# Altium PCB steve.PcbDoc (part 1 of 3)
Units mm, origin at the board's own origin, x right, y up, seen from the top; angles counter-clockwise.
Board outline 168.82 x 167.1 mm, 4 copper layers (Top Layer, Mid-Layer 1, Mid-Layer 2, Bottom Layer); 272 components, 254 nets, 1057 pads, 241 vias.
Unrouted connection lines stored in the file: 229.
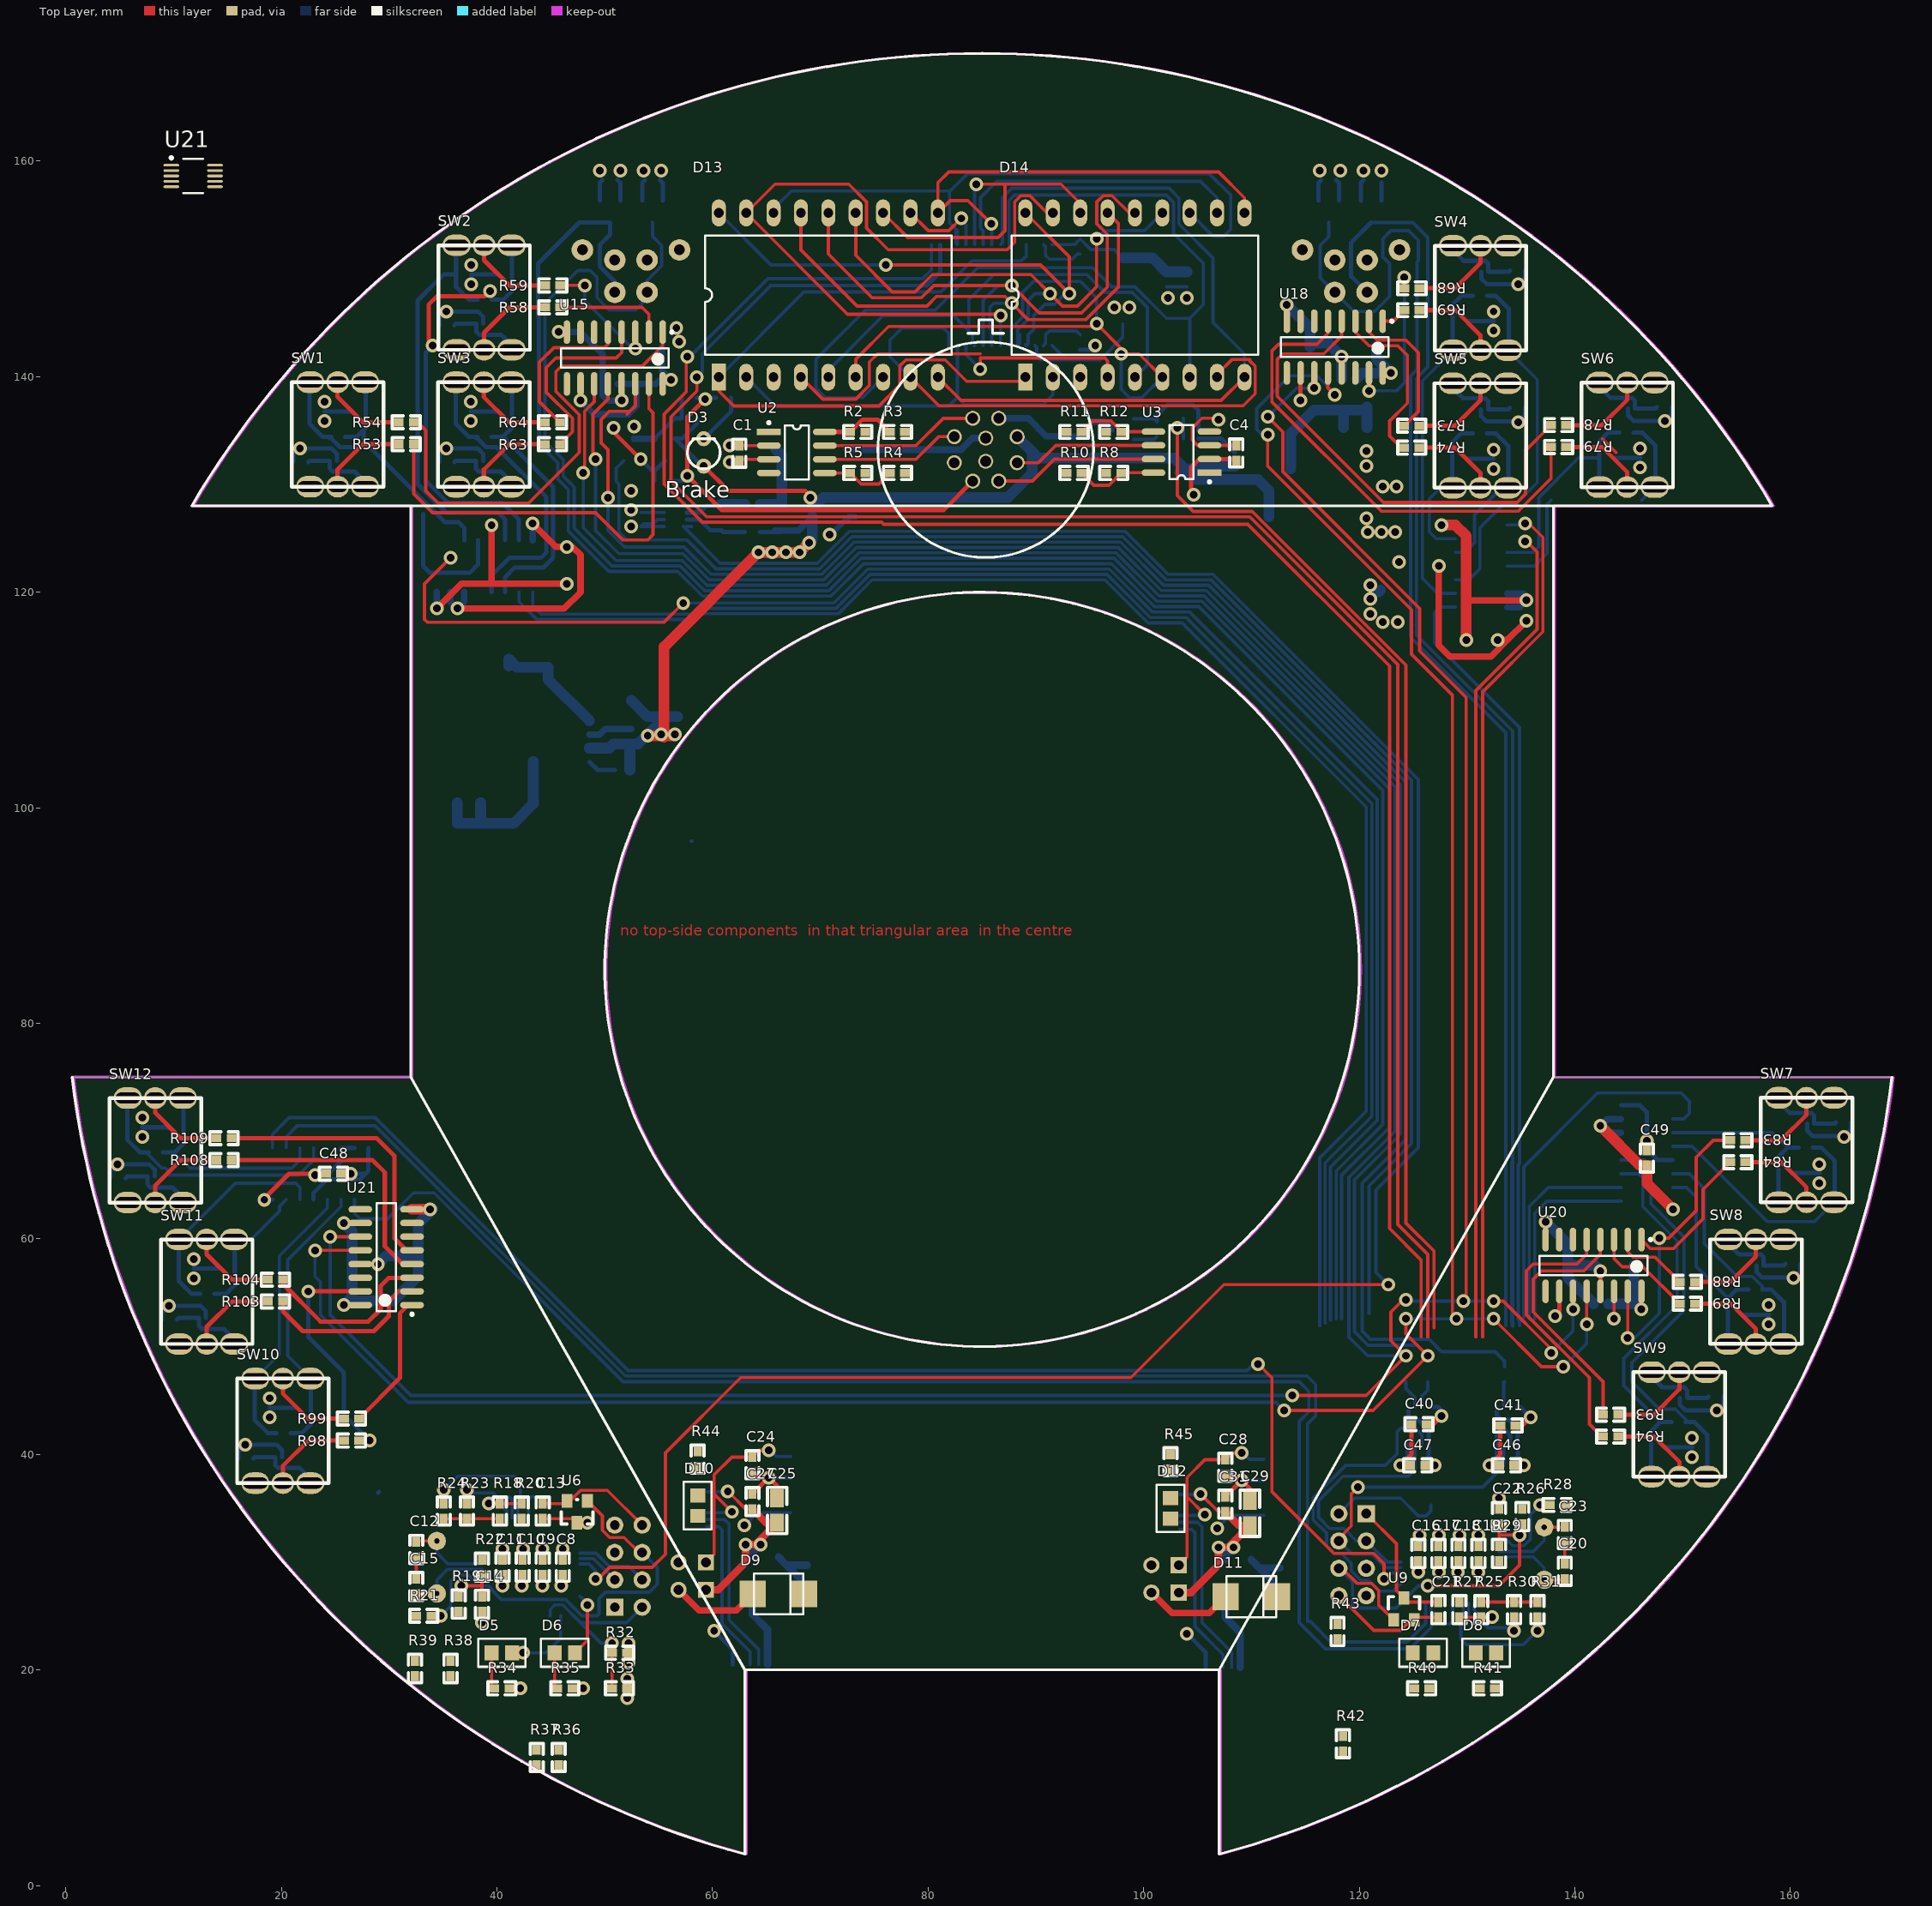
[diagram p0: Top Layer view]
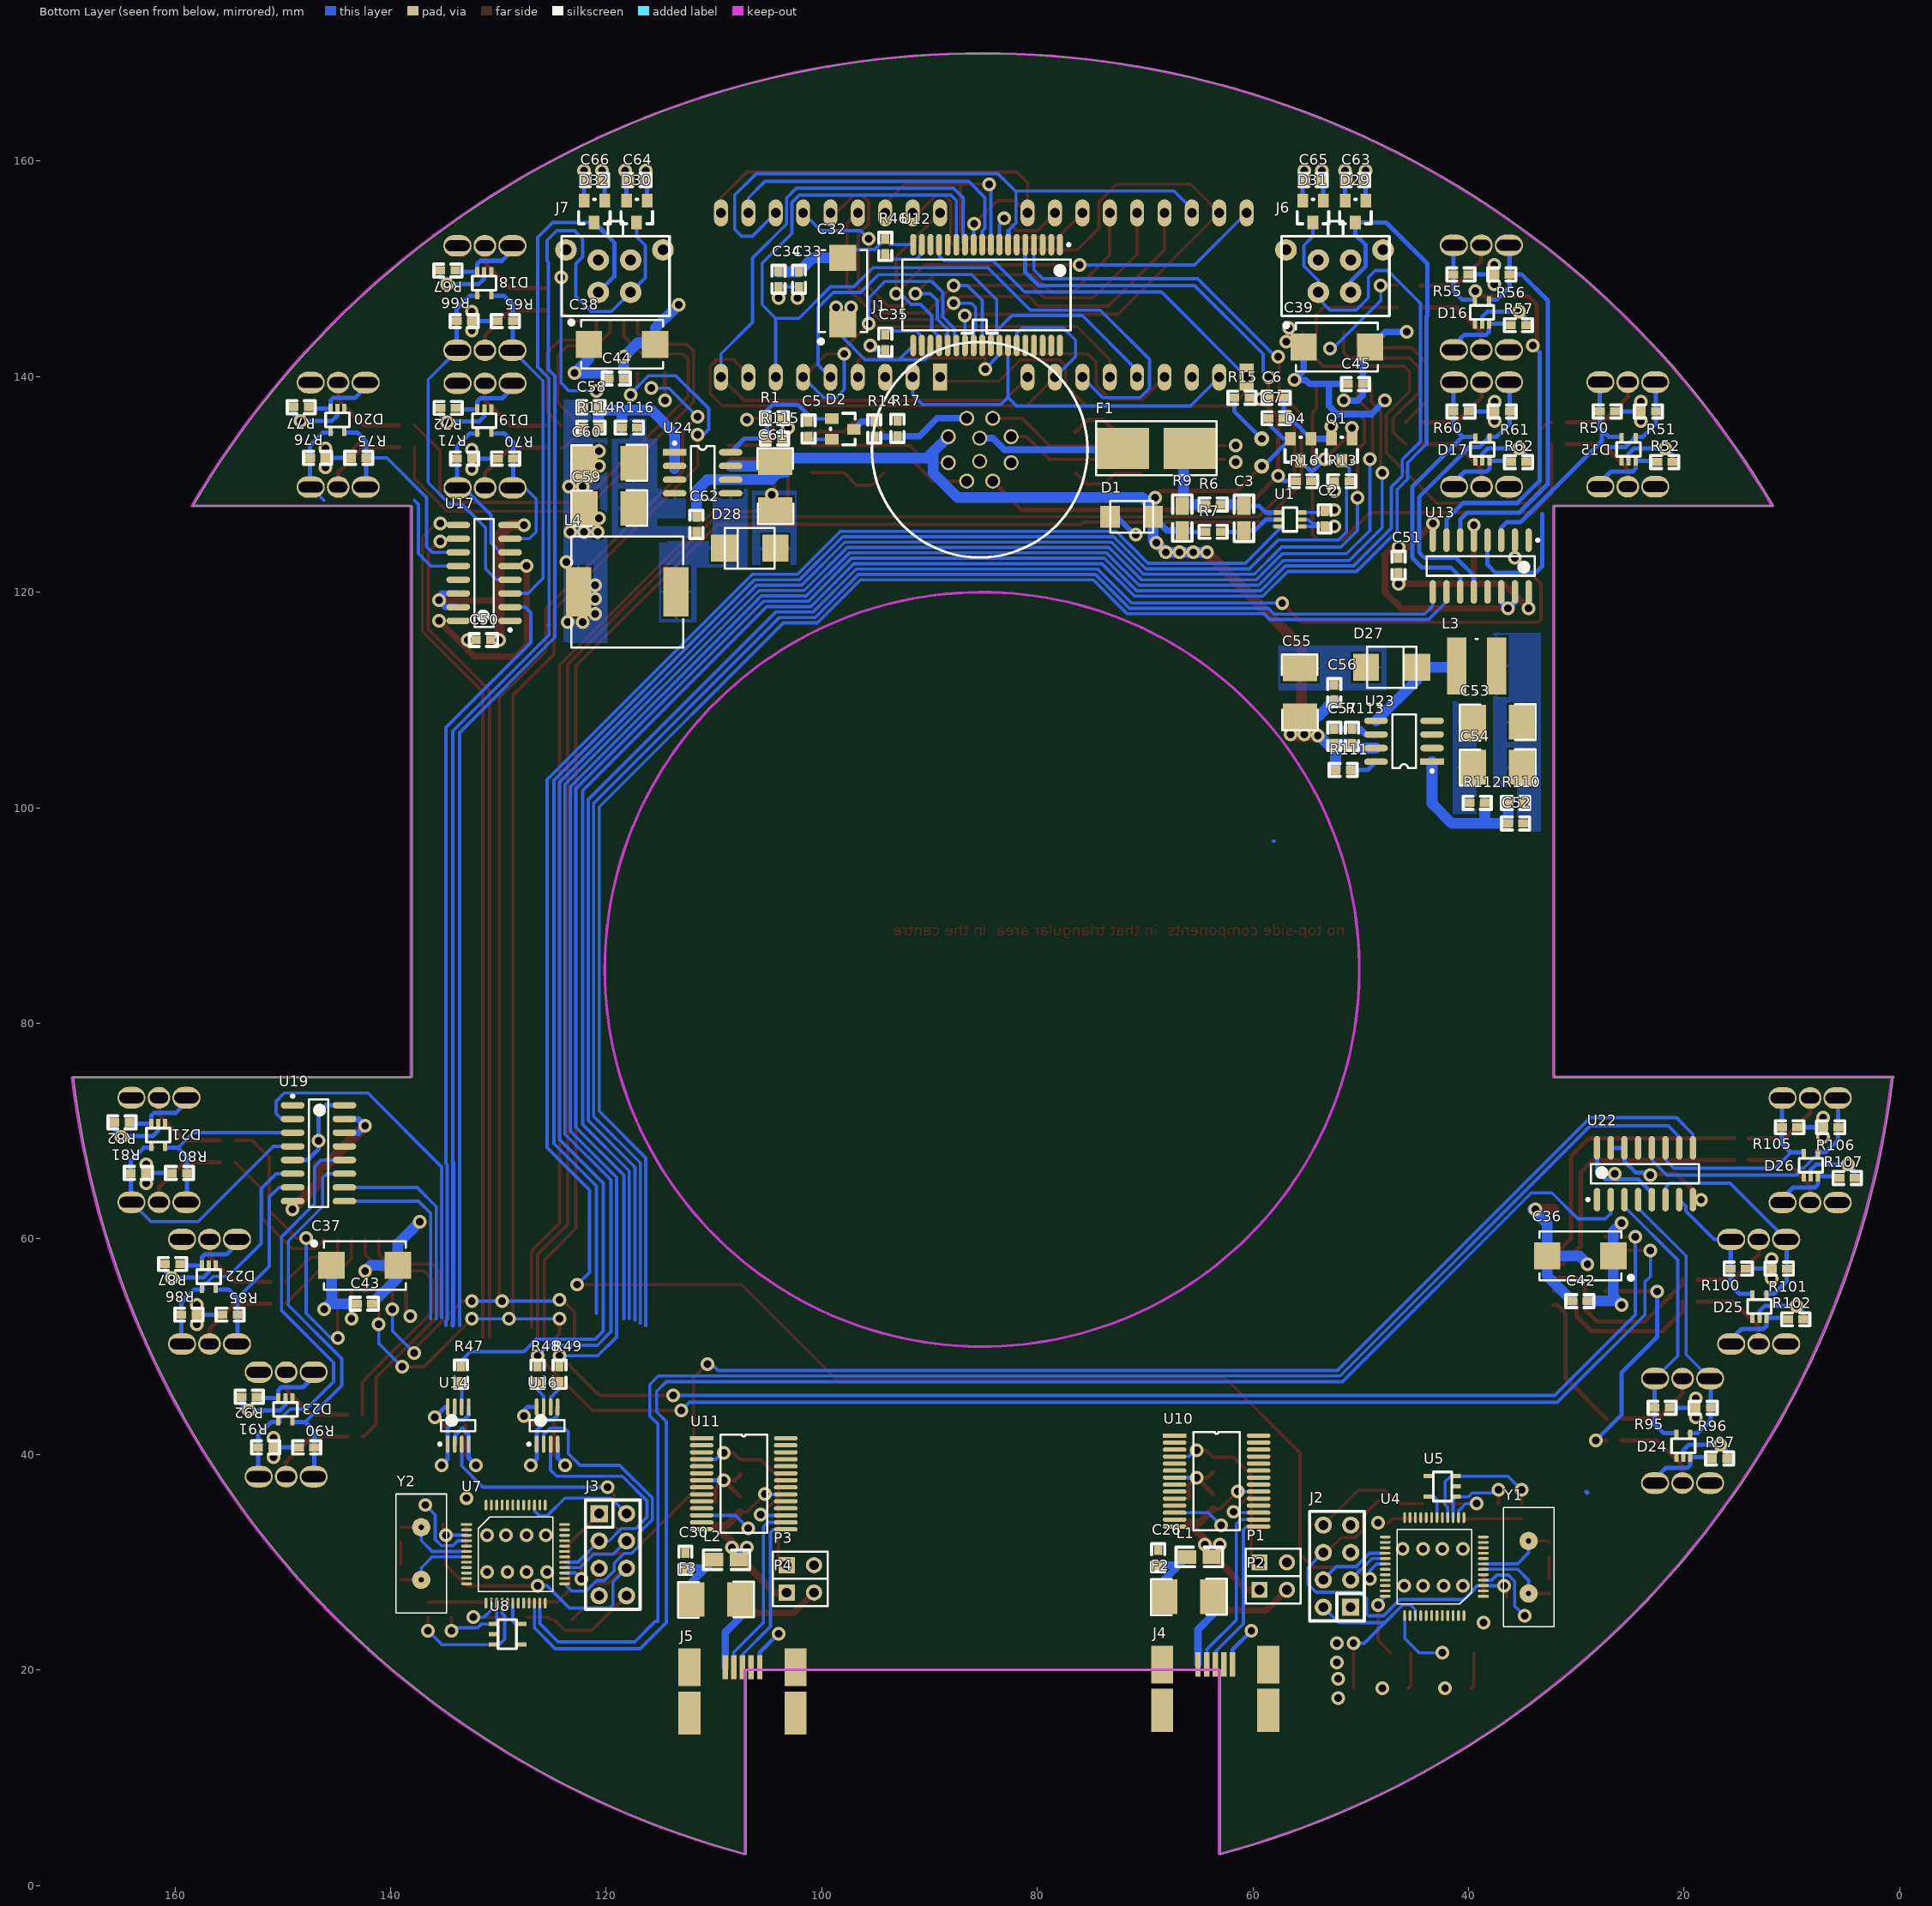
[diagram p1: Bottom Layer view, seen from below]
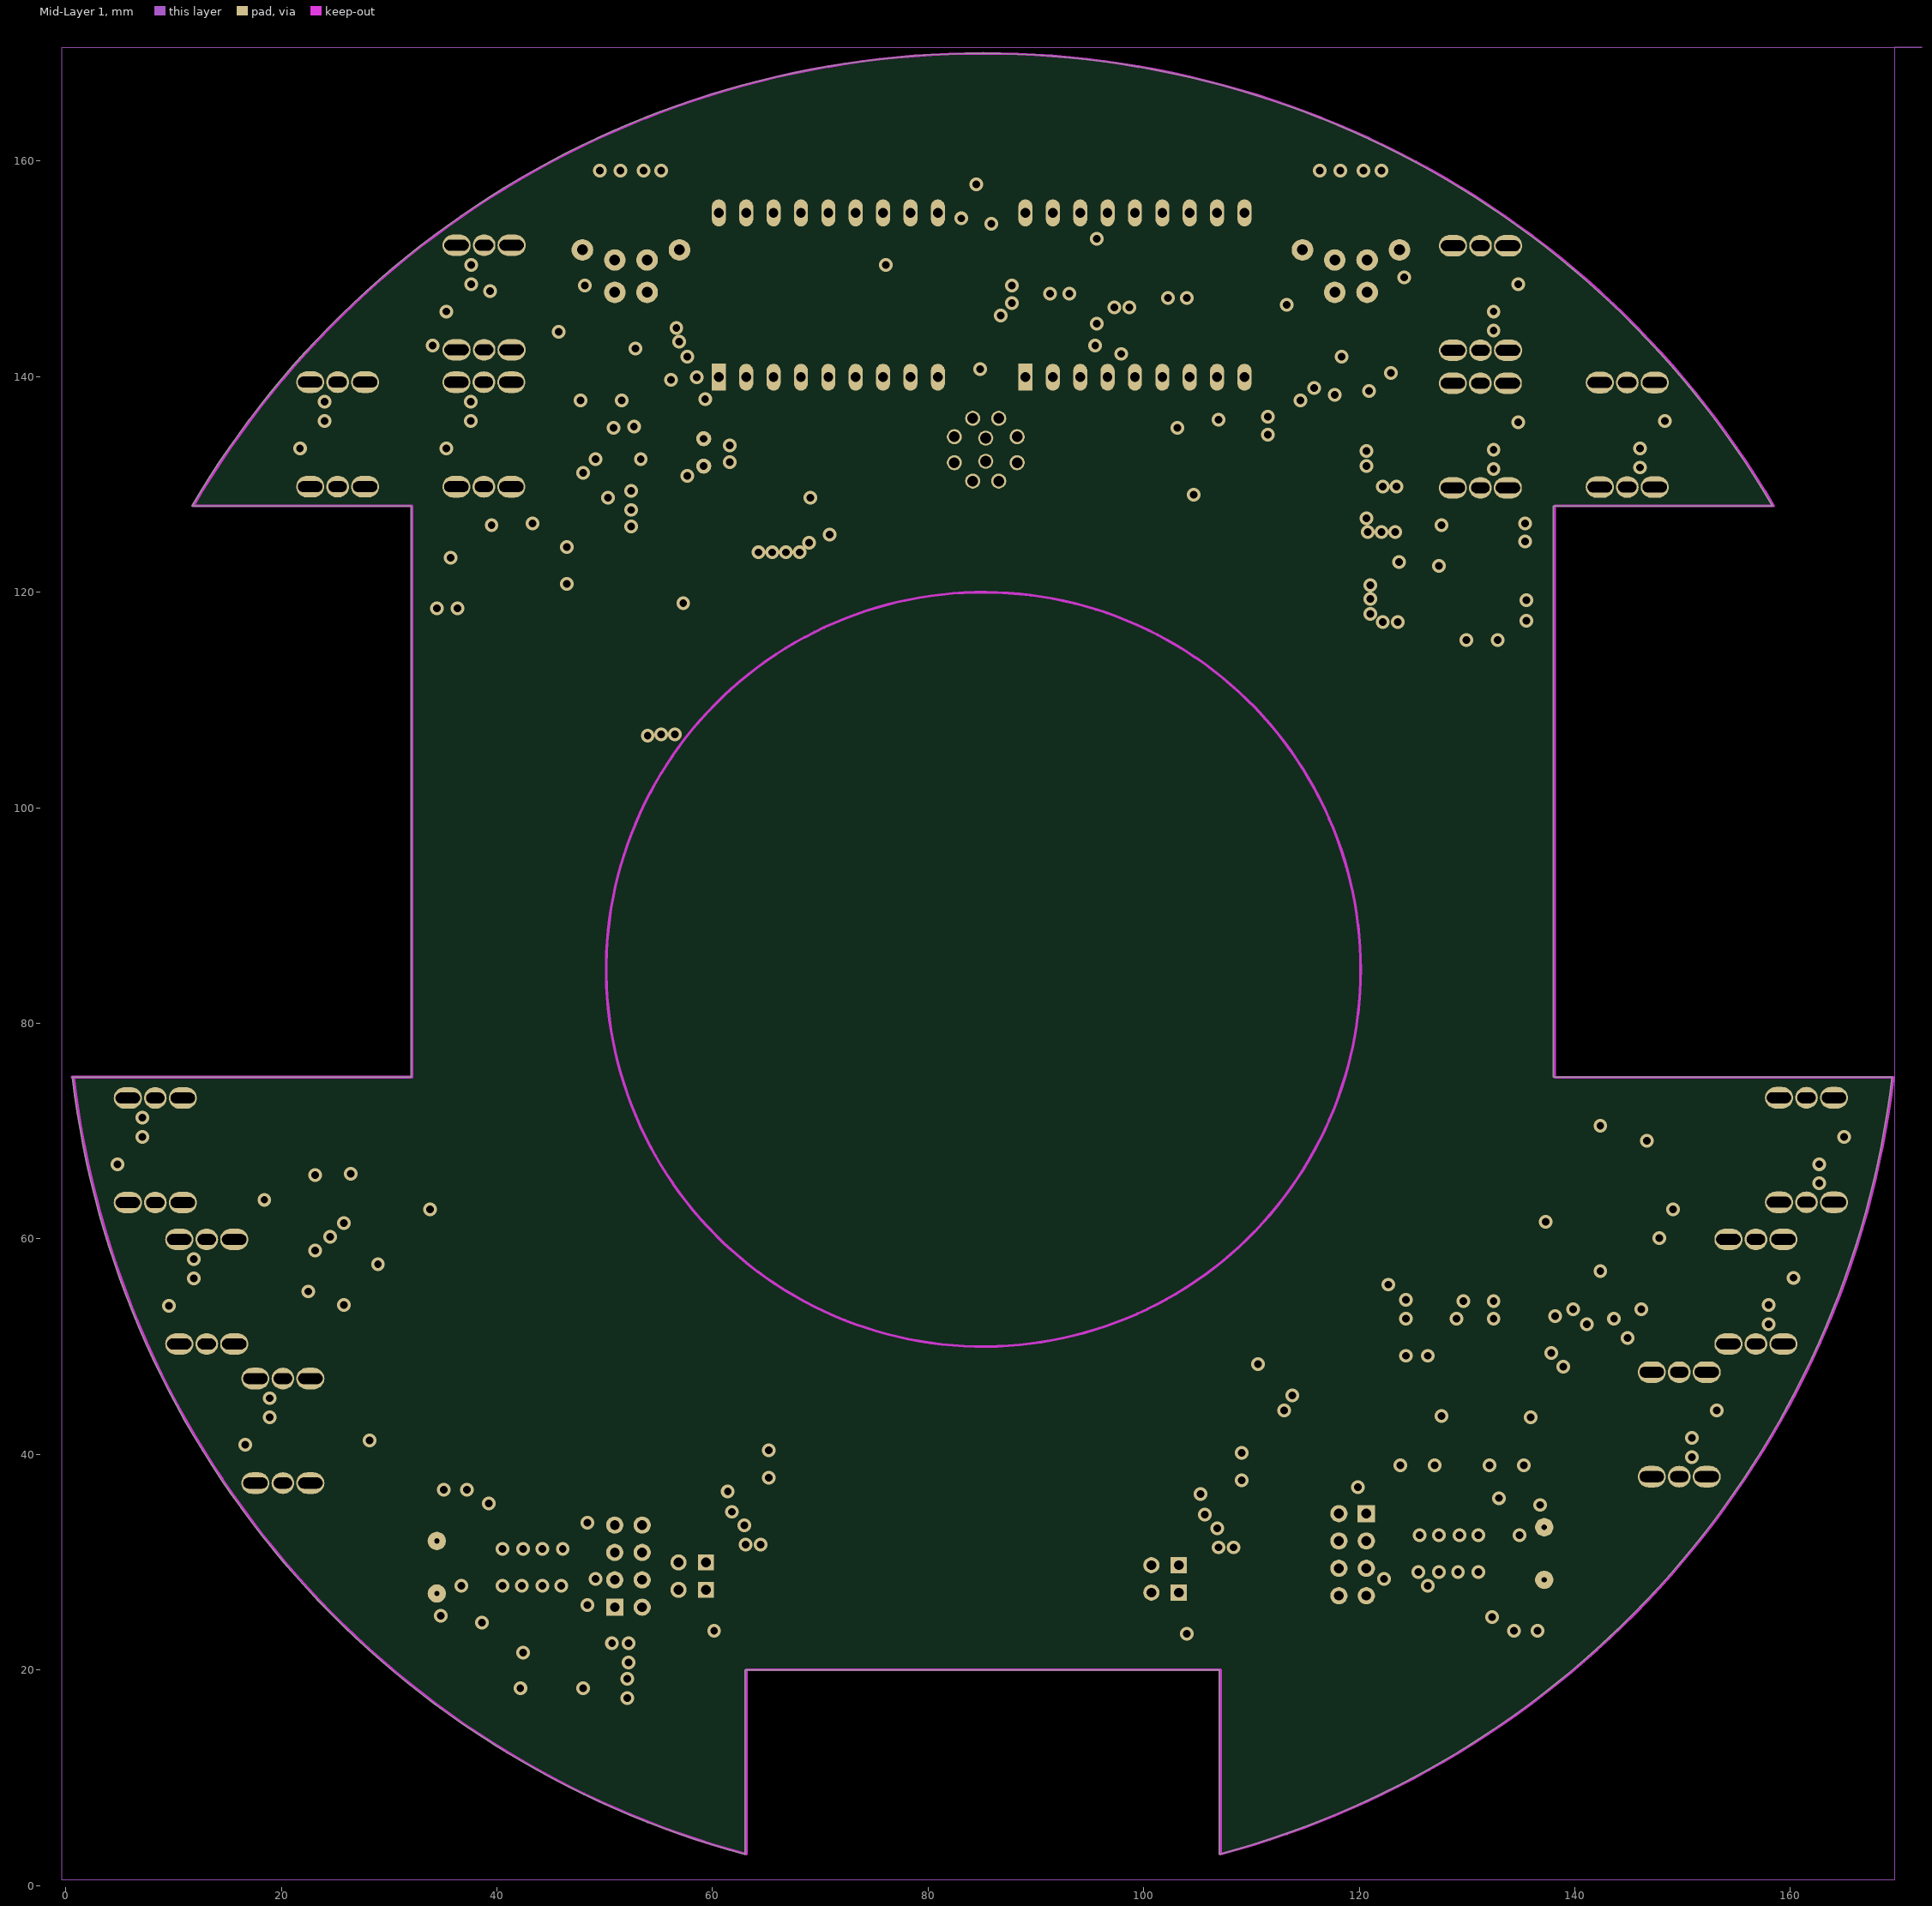
[diagram p2: Mid-Layer 1]
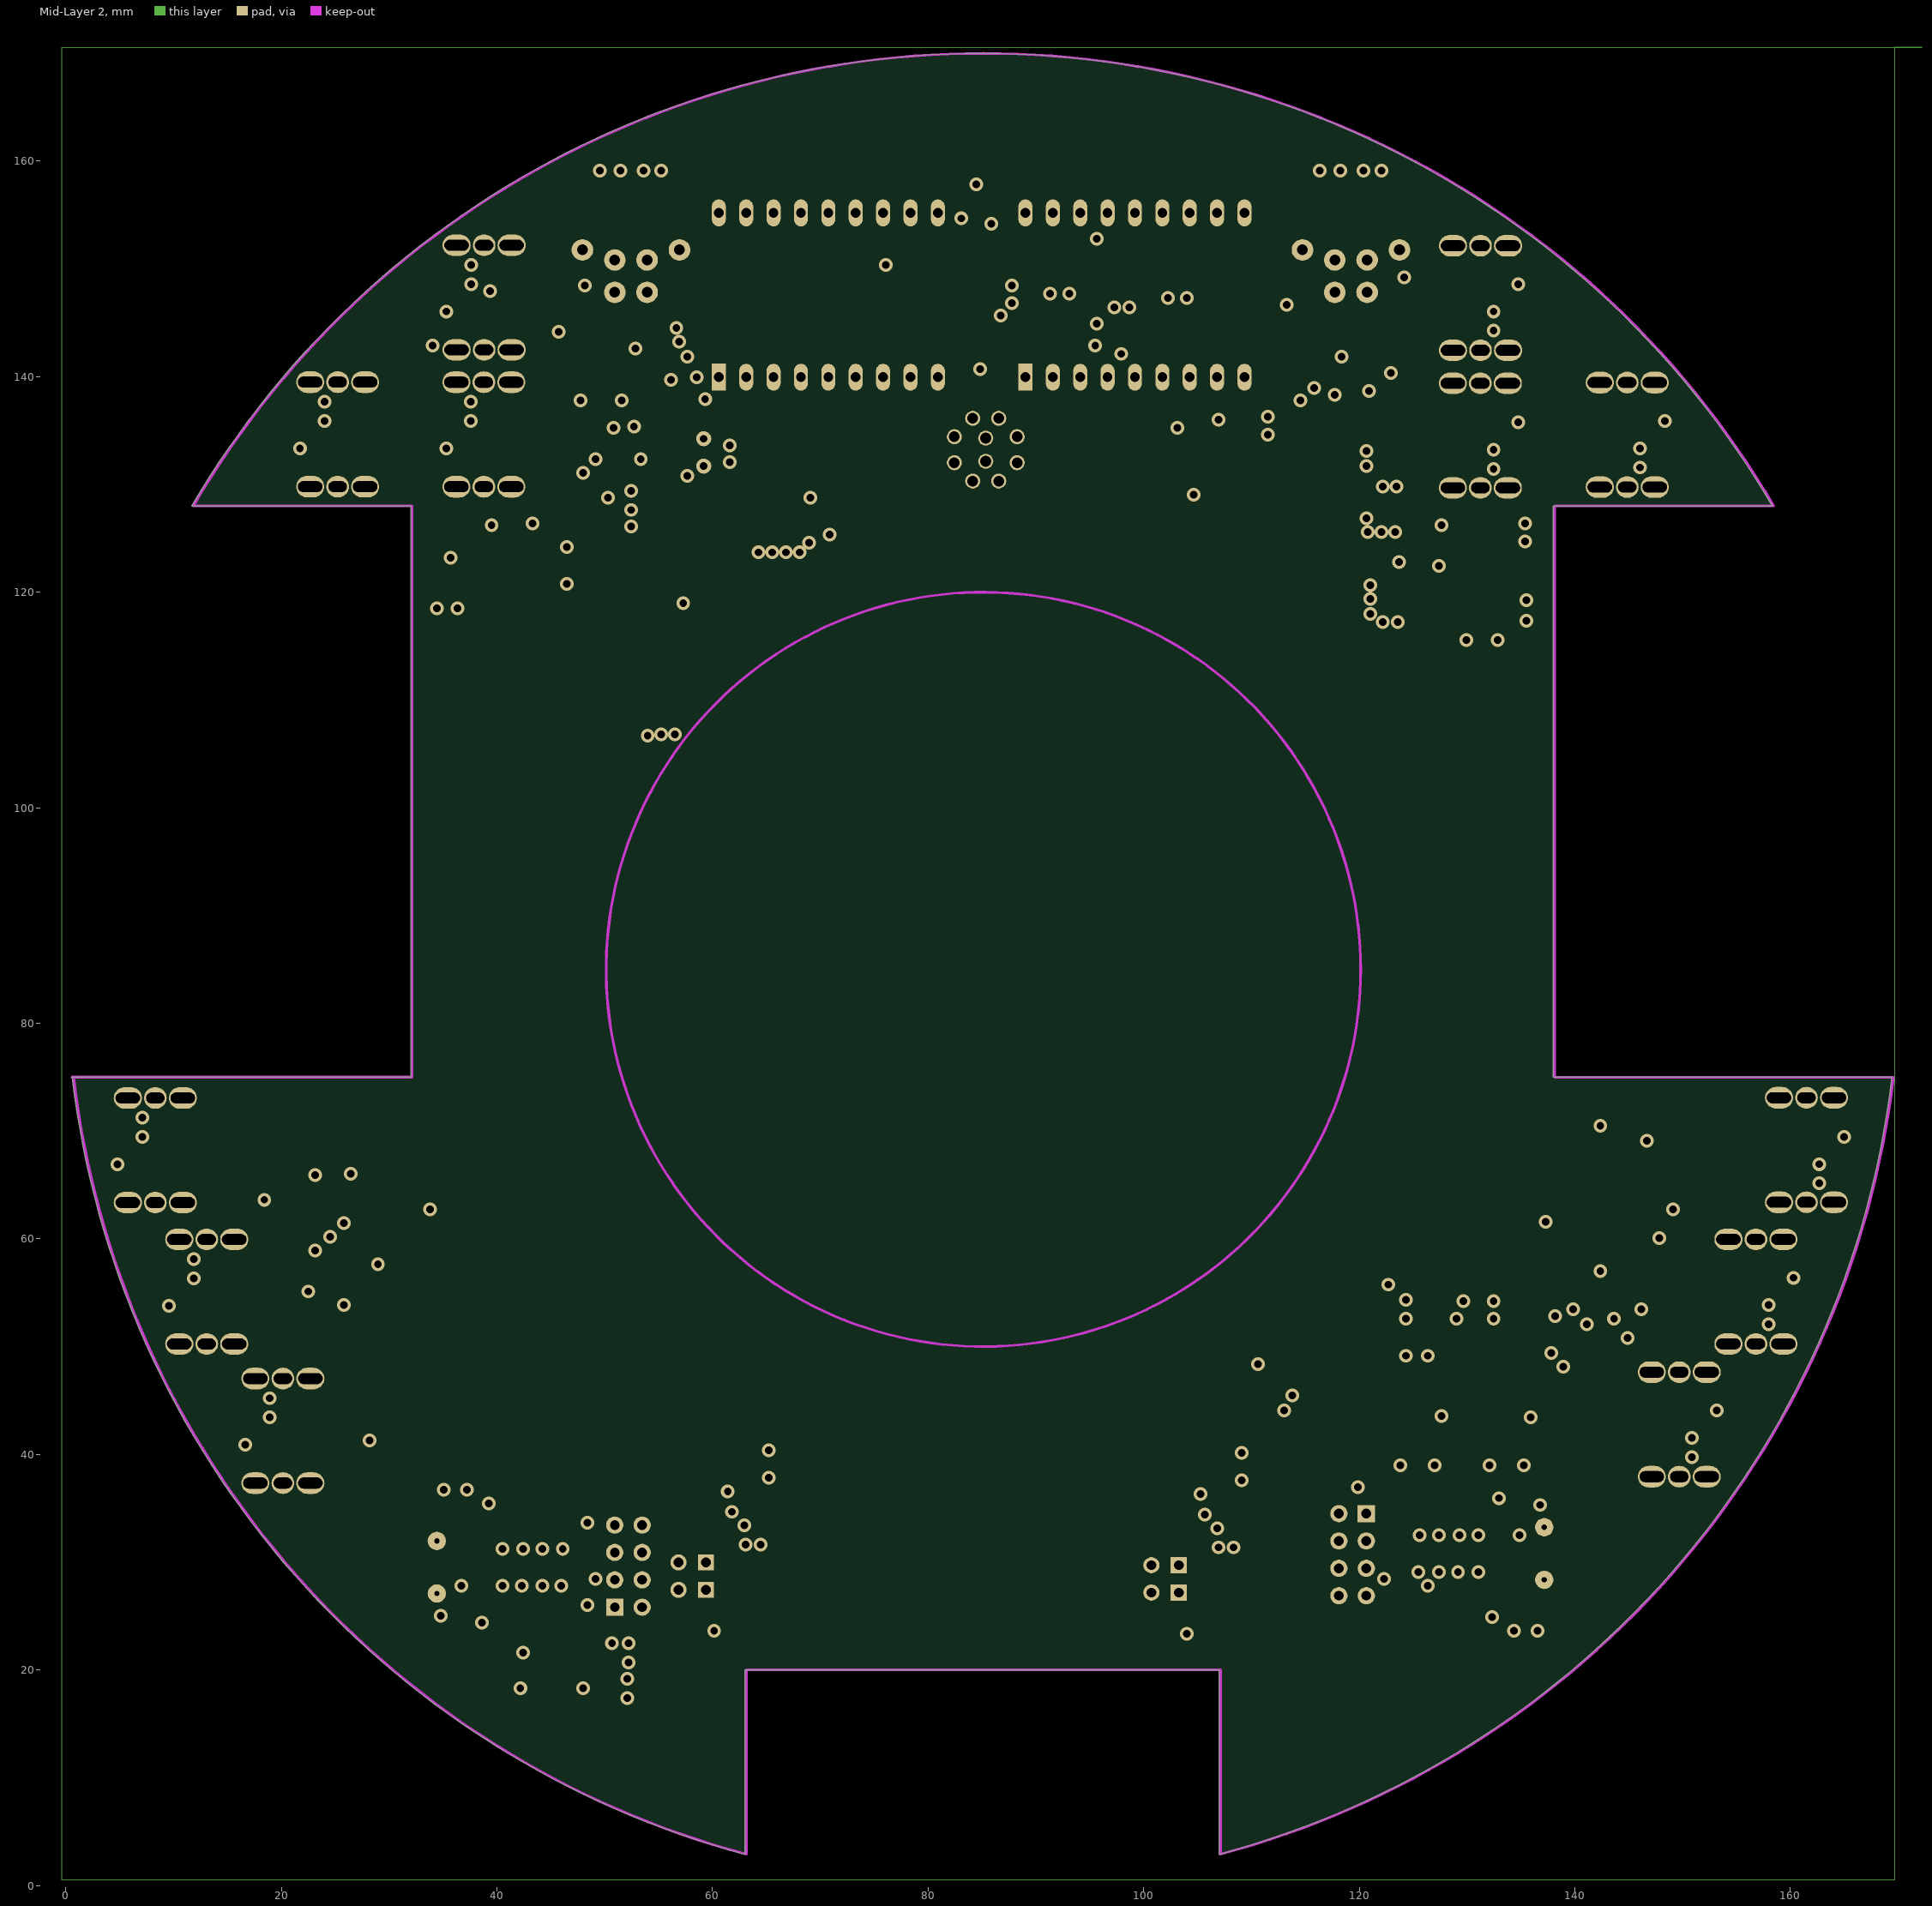
[diagram p3: Mid-Layer 2]

## Layer stack, top to bottom
Top Layer: signal copper 0.0356
Dielectric: core 0.32, FR-4, Dk 4.8
Mid-Layer 1: signal copper 0.0356
Dielectric: prepreg 0.32, FR-4, Dk 4.8
Mid-Layer 2: signal copper 0.0356
Dielectric: core 0.32, FR-4, Dk 4.8
Bottom Layer: signal copper 0.0356

## Board outline
62.992,2.899 cw(c85,85) 0.592,74.988 0.592,75 32,75 32,128 11.691,128 11.691,128.021 cw(c85,85) 158.309,128.021 158.309,128 138,128 138,75 169.409,75 169.409,74.994 cw(c85,85) 107.021,2.902 107,2.902 107,20 63,20

## Design rules (kind name [scope] priority, off if disabled: settings)
AssemblyTestPointUsage AssemblyTestPointUsage_1 [All] p2:
AssemblyTestpoint AssemblyTestpoint_1 [All] p2: testpointundercomponent=TRUE minsize=1.016 maxsize=2.54 preferedsize=1.524 minholesize=0 maxholesize=1.016 preferedholesize=0.813 testpointgrid=0.025 usegrid=TRUE gridtolerance=0 allowsidetop=TRUE allowsidebottom=TRUE
Clearance [All] p1: gap=0.2
ComponentClearance [All] p1 off: gap=0.254 collisioncheckmode=3 verticalgap=0.254 showdistances=FALSE
ComponentClearance ComponentClearance_1 [All] p2 off: gap=0.254 collisioncheckmode=3 verticalgap=0.254 showdistances=FALSE
DiffPairsRouting DiffPairsRouting_1 [All] p2: maxlimit=0.254 minlimit=0.254 mostfreqgap=0.254 maxuncoupledlength=12.7
FabricationTestPointUsage TestPointUsage [All] p2: valid=0 allowmultiple=FALSE
FabricationTestpoint Testpoint [All] p2: side=3 testpointundercomponent=TRUE minsize=1.016 maxsize=2.54 preferedsize=1.524 minholesize=0 maxholesize=1.016 preferedholesize=0.813 testpointgrid=0.025 allowsidetop=TRUE allowsidebottom=TRUE usegrid=TRUE gridtolerance=0
FanoutControl Fanout_LCC [IsLCC] p1: bgadir=Out bgaviamode=Centered fanoutstyle=Auto fanoutdirection=Alternating viagrid=0.025 // Fanout_LCC (Default Rule)
FanoutControl Fanout_BGA [IsBGA] p2: bgadir=Out bgaviamode=Centered fanoutstyle=Auto fanoutdirection=Alternating viagrid=0.025 // Fanout_BGA (Default Rule)
FanoutControl Fanout_Small [(CompPinCount < 5)] p3: bgadir=Out bgaviamode=Centered fanoutstyle=Auto fanoutdirection=OutThenIn viagrid=0.025 // Fanout_Small (Default Rule)
FanoutControl Fanout_SOIC [IsSOIC] p4: bgadir=Out bgaviamode=Centered fanoutstyle=Auto fanoutdirection=Alternating viagrid=0.025 // Fanout_SOIC (Default Rule)
FanoutControl Fanout_BGA_1 [IsBGA] p6: bgadir=Out bgaviamode=Centered fanoutstyle=Auto fanoutdirection=Alternating viagrid=0.025 // Fanout_BGA (Default Rule)
FanoutControl Fanout_LCC_1 [IsLCC] p7: bgadir=Out bgaviamode=Centered fanoutstyle=Auto fanoutdirection=Alternating viagrid=0.025 // Fanout_LCC (Default Rule)
FanoutControl Fanout_SOIC_1 [IsSOIC] p8: bgadir=Out bgaviamode=Centered fanoutstyle=Auto fanoutdirection=Alternating viagrid=0.025 // Fanout_SOIC (Default Rule)
FanoutControl Fanout_Small_1 [(CompPinCount < 5)] p9: bgadir=Out bgaviamode=Centered fanoutstyle=Auto fanoutdirection=OutThenIn viagrid=0.025 // Fanout_Small (Default Rule)
FanoutControl Fanout_Default_1 [All] p10: bgadir=Out bgaviamode=Centered fanoutstyle=Auto fanoutdirection=Alternating viagrid=0.025 // Fanout_Default (Default Rule)
Height Height_1 [All] p2: minheight=0 maxheight=25.4 prefheight=12.7
HoleSize HoleSize_1 [All] p2: absolutevalues=TRUE maxlimit=2.54 minlimit=0.025 maxpercent=80.000 minpercent=20.000
HoleToHoleClearance HoleToHoleClearance_1 [All] p2: gap=0.254 allowstackedmicrovias=TRUE
LayerPairs LayerPairs_1 [All] p2: enforce=TRUE
MinimumSolderMaskSliver MinimumSolderMaskSliver_1 [All] p2: minsoldermaskwidth=0.254
NetAntennae NetAntennae_1 [All] p2: netantennaetolerance=0
PasteMaskExpansion PasteMaskExpansion_1 [All] p2: expansion=0
PlaneClearance PlaneClearance_1 [All] p2: clearance=0.508
PolygonConnect [All] p1: connectstyle=Relief reliefconductorwidth=0.254 reliefentries=4 polygonreliefangle="90 Angle"
PolygonConnect PolygonConnect_1 [All] p2: connectstyle=Relief reliefconductorwidth=0.254 reliefentries=4 polygonreliefangle="90 Angle"
RoomDefinition USBserial2 [InComponentClass('USBserial2')] p1: confinementstyle=ConfineIn formatcopy=TRUE lockcomponents=FALSE outline 98.806,11.684 98.806,42.545 115.824,42.545 115.824,11.684
RoomDefinition USBserial1 [InComponentClass('USBserial1')] p2: confinementstyle=ConfineIn formatcopy=TRUE lockcomponents=FALSE outline 54.936,11.938 54.936,42.799 71.954,42.799 71.954,11.938
RoomDefinition TopLevel [InComponentClass('TopLevel')] p3 off: confinementstyle=ConfineIn formatcopy=TRUE lockcomponents=FALSE outline 102.048,133.048 107.128,133.048 107.128,134.85 102.048,134.85
RoomDefinition U_paddles [InComponentClass('U_paddles')] p4 off: confinementstyle=ConfineIn formatcopy=TRUE lockcomponents=FALSE outline 46.228,139.192 125.095,139.192 125.095,160.909 46.228,160.909
RoomDefinition U_ltc1474_100mA [InComponentClass('U_ltc1474_100mA')] p5 off: confinementstyle=ConfineIn formatcopy=TRUE lockcomponents=FALSE outline 32.893,96.647 32.893,116.459 58.801,116.459 58.801,96.647
RoomDefinition U_ltc1474_400mA [InComponentClass('U_ltc1474_400mA')] p6 off: confinementstyle=ConfineIn formatcopy=TRUE lockcomponents=FALSE outline 125.403,142.89 125.403,114.173 101.273,114.173 101.273,142.89
RoomDefinition U_IBUT4 [InComponentClass('U_IBUT4')] p7 off: confinementstyle=ConfineIn formatcopy=TRUE lockcomponents=FALSE outline 136.652,140.97 123.19,140.97 123.19,128.143 136.652,128.143
RoomDefinition U_IBUT5 [InComponentClass('U_IBUT5')] p8 off: confinementstyle=ConfineIn formatcopy=TRUE lockcomponents=FALSE outline 150.114,141.097 136.779,141.097 136.779,128.27 150.114,128.27
RoomDefinition U_IBUT1 [InComponentClass('U_IBUT1')] p9 off: confinementstyle=ConfineIn formatcopy=TRUE lockcomponents=FALSE outline 33.782,141.351 46.609,141.351 46.609,153.416 33.782,153.416
RoomDefinition U_IBUT2 [InComponentClass('U_IBUT2')] p10 off: confinementstyle=ConfineIn formatcopy=TRUE lockcomponents=FALSE outline 33.655,128.651 46.736,128.651 46.736,141.097 33.655,141.097
RoomDefinition CAN [InComponentClass('CAN')] p11 off: confinementstyle=ConfineIn formatcopy=TRUE lockcomponents=FALSE outline 48.387,120.777 115.697,120.777 115.697,139.065 48.387,139.065
RoomDefinition U_alphanumeric [InComponentClass('U_alphanumeric')] p12 off: confinementstyle=ConfineIn formatcopy=TRUE lockcomponents=FALSE outline 57.658,136.906 112.268,136.906 112.268,161.544 57.658,161.544
RoomDefinition U_IBUT0 [InComponentClass('U_IBUT0')] p13 off: confinementstyle=ConfineIn formatcopy=TRUE lockcomponents=FALSE outline 20.32,128.524 33.274,128.524 33.274,140.716 20.32,140.716
RoomDefinition U_lpc_ws [InComponentClass('U_lpc_ws')] p14 off: confinementstyle=ConfineIn formatcopy=TRUE lockcomponents=FALSE outline 111.76,11.557 145.542,11.557 145.542,39.37 111.76,39.37
RoomDefinition U_lpc_telem [InComponentClass('U_lpc_telem')] p15 off: confinementstyle=ConfineIn formatcopy=TRUE lockcomponents=FALSE outline 30.988,9.779 55.753,9.779 55.753,38.735 30.988,38.735
RoomDefinition U_lpc11c142 [InComponentClass('U_lpc11c142')] p16 off: confinementstyle=ConfineIn formatcopy=TRUE lockcomponents=FALSE outline 140.462,36.83 116.205,36.83 116.205,21.209 140.462,21.209
RoomDefinition U_lpc11c141 [InComponentClass('U_lpc11c141')] p17 off: confinementstyle=ConfineIn formatcopy=TRUE lockcomponents=FALSE outline 31.369,23.368 55.753,23.368 55.753,39.116 31.369,39.116
RoomDefinition U_IBUT11 [InComponentClass('U_IBUT11')] p18 off: confinementstyle=ConfineIn formatcopy=TRUE lockcomponents=FALSE outline 2.39,60.572 17.884,60.572 17.884,76.193 2.39,76.193
RoomDefinition U_IBUT10 [InComponentClass('U_IBUT10')] p19 off: confinementstyle=ConfineIn formatcopy=TRUE lockcomponents=FALSE outline 7.16,47.451 22.654,47.451 22.654,63.072 7.16,63.072
RoomDefinition U_IBUT9 [InComponentClass('U_IBUT9')] p20 off: confinementstyle=ConfineIn formatcopy=TRUE lockcomponents=FALSE outline 14.224,34.544 29.718,34.544 29.718,50.165 14.224,50.165
RoomDefinition U_IBUT8 [InComponentClass('U_IBUT8')] p21 off: confinementstyle=ConfineIn formatcopy=TRUE lockcomponents=FALSE outline 155.598,50.426 140.104,50.426 140.104,34.805 155.598,34.805
RoomDefinition U_IBUT7 [InComponentClass('U_IBUT7')] p22 off: confinementstyle=ConfineIn formatcopy=TRUE lockcomponents=FALSE outline 162.71,62.745 147.216,62.745 147.216,47.124 162.71,47.124
RoomDefinition U_IBUT6 [InComponentClass('U_IBUT6')] p23 off: confinementstyle=ConfineIn formatcopy=TRUE lockcomponents=FALSE outline 167.401,75.887 151.907,75.887 151.907,60.266 167.401,60.266
RoomDefinition U_IBUT3 [InComponentClass('U_IBUT3')] p24 off: confinementstyle=ConfineIn formatcopy=TRUE lockcomponents=FALSE outline 137.16,154.559 121.666,154.559 121.666,138.938 137.16,138.938
RoomDefinition U_button_io [InComponentClass('U_button_io')] p25 off: confinementstyle=ConfineIn formatcopy=TRUE lockcomponents=FALSE outline -0.635,0.889 169.418,0.889 169.418,164.973 -0.635,164.973
RoutingLayers [All] p1: top layer_v5=TRUE mid layer 1_v5=FALSE mid layer 2_v5=FALSE bottom layer_v5=TRUE
RoutingPriority RoutingPriority_1 [All] p2: routingpriority=0
RoutingTopology RoutingTopology_1 [All] p2: topology=Shortest
RoutingVias [All] p1: holewidth=0.6 width=1 viastyle="Through Hole" minholewidth=0.711 minwidth=1.27 maxholewidth=0.711 maxwidth=1.27
ShortCircuit ShortCircuit_1 [All] p2: allowed=FALSE
SilkToSilkClearance SilkToSilkClearance_1 [All] p2: silktosilkclearance=0.254
SilkscreenOverComponentPads [All] p1: minsilkscreentomaskgap=0.254
SilkscreenOverComponentPads SilkscreenOverComponentPads_1 [All] p2: minsilkscreentomaskgap=0.254
SolderMaskExpansion [All] p1: expansion=0.102
SolderMaskExpansion SolderMaskExpansion_1 [All] p2: expansion=0.102
UnRoutedNet UnRoutedNet_1 [All] p2:
Width [All] p1: maxlimit=10 minlimit=0.2 preferedwidth=0.254 midlayer1_maxwidth=0.2 midlayer1_prefwidth=0.2 midlayer2_maxwidth=0.2 midlayer2_prefwidth=0.2 minimp=50.000000 maximp=50.000000 favimp=50.000000
21 further rules are at their usual default settings.

## Classes and differential pairs
component class CAN: C1 C2 C3 C4 C5 C6 C7 D1 D2 D3 D4 F1 J1 Q1 R2 R3 R4 R5 R6 R7 R8 R9 R10 R11 R12 R13 R14 R15 R16 R17 U1 U2 U3
channel class USBserial: USBserial1 USBserial2
channel class lpc11c14: U_lpc11c141 U_lpc11c142
channel class illuminated_button: U_IBUT0 U_IBUT1 U_IBUT2 U_IBUT3 U_IBUT4 U_IBUT5 U_IBUT6 U_IBUT7 U_IBUT8 U_IBUT9 U_IBUT10 U_IBUT11
component class USBserial2: C28 C29 C30 C31 D11 D12 F3 J5 L2 P3 P4 R45 U11
component class USBserial1: C24 C25 C26 C27 D9 D10 F2 J4 L1 P1 P2 R44 U10
component class U_paddles: C63 C64 C65 C66 D29 D30 D31 D32 J6 J7
component class U_lpc_ws: D7 D8 R40 R41 R42 R43
component class U_lpc_telem: D5 D6 R32 R33 R34 R35 R36 R37 R38 R39
component class U_lpc11c142: C16 C17 C18 C19 C20 C21 C22 C23 J3 R25 R26 R27 R28 R29 R30 R31 U7 U8 U9 Y2
component class U_lpc11c141: C8 C9 C10 C11 C12 C13 C14 C15 J2 R18 R19 R20 R21 R22 R23 R24 U4 U5 U6 Y1
component class U_IBUT11: D26 R105 R106 R107 R108 R109 SW12
component class U_IBUT10: D25 R100 R101 R102 R103 R104 SW11
component class U_IBUT9: D24 R95 R96 R97 R98 R99 SW10
component class U_IBUT8: D23 R90 R91 R92 R93 R94 SW9
component class U_IBUT7: D22 R85 R86 R87 R88 R89 SW8
component class U_IBUT6: D21 R80 R81 R82 R83 R84 SW7
component class U_IBUT5: D20 R75 R76 R77 R78 R79 SW6
component class U_IBUT4: D19 R70 R71 R72 R73 R74 SW5
component class U_IBUT3: D18 R65 R66 R67 R68 R69 SW4
component class U_IBUT2: D17 R60 R61 R62 R63 R64 SW3
component class U_IBUT1: D16 R55 R56 R57 R58 R59 SW2
component class U_IBUT0: D15 R50 R51 R52 R53 R54 SW1
component class U_button_io: C36 C37 C38 C39 C40 C41 C42 C43 C44 C45 C46 C47 C48 C49 C50 C51 R47 R48 R49 U13 U14 U15 U16 U17 U18 U19 U20 U21 U22
component class U_alphanumeric: C32 C33 C34 C35 D13 D14 R46 U12 U21
component class TopLevel: R1
component class U_ltc1474_100mA: C52 C53 C54 C55 C56 C57 D27 L3 R110 R111 R112 R113 U23
component class U_ltc1474_400mA: C58 C59 C60 C61 C62 D28 L4 R114 R115 R116 U24

## Components (designator, comment, footprint, x,y, rotation, side; value= is the part's Value field where it differs from the comment)
C1 "100nF" 0603 62.484,133.604 r270 top (schematic designator C29)
C2 "100n" 0603 53.34,126.111 r90 bottom (schematic designator C30)
C3 "10uF" 0805 60.833,128.016 r270 bottom (schematic designator C31)
C4 "100nF" 0603 108.585,132.207 r90 top (schematic designator C32)
C5 "100nF" 0603 101.219,134.442 r90 bottom (schematic designator C33)
C6 "100nF" 0603 58.547,138.049 r180 bottom (schematic designator C34)
C7 "100nF" 0603 58.547,136.144 r180 bottom (schematic designator C35)
C8 "100nF" 0603 46.101,30.226 r270 top (schematic designator C1)
C9 "100nF" 0603 44.238,30.226 r270 top (schematic designator C2)
C10 "100nF" 0603 42.376,30.226 r270 top (schematic designator C3)
C11 "100nF" 0603 40.513,30.226 r270 top (schematic designator C4)
C12 "18pF" 0603 32.512,31.877 r270 top (schematic designator C5)
C13 "100nF" 0603 44.238,34.036 r90 top (schematic designator C6)
C14 "10nF" 0603 38.608,26.797 r270 top (schematic designator C7)
C15 "18pF" 0603 32.512,27.048 r90 top (schematic designator C8)
C16 "100nF" 0603 125.476,30.099 r90 top (schematic designator C1)
C17 "100nF" 0603 127.339,30.099 r90 top (schematic designator C2)
C18 "100nF" 0603 129.201,30.099 r90 top (schematic designator C3)
C19 "100nF" 0603 131.064,30.099 r90 top (schematic designator C4)
C20 "18pF" 0603 139.065,28.448 r90 top (schematic designator C5)
C21 "100nF" 0603 127.339,26.289 r270 top (schematic designator C6)
C22 "10nF" 0603 132.969,33.528 r90 top (schematic designator C7)
C23 "18pF" 0603 139.065,33.277 r270 top (schematic designator C8)
C24 "100n" 0603 63.699,39.751 r270 top (schematic designator C9)
C25 "10u" 0805 65.985,35.941 r270 top (schematic designator C10)
C26 "100n" 0603 68.779,29.718 r90 bottom (schematic designator C11)
C27 "100n" 0603 63.699,34.925 r90 top (schematic designator C12)
C28 "100n" 0603 107.569,39.497 r270 top (schematic designator C9)
C29 "10u" 0805 109.855,35.687 r270 top (schematic designator C10)
C30 "100n" 0603 112.649,29.464 r90 bottom (schematic designator C11)
C31 "100n" 0603 107.569,34.668 r90 top (schematic designator C12)
C32 "" "CAPMP7343X19N (Murata D4)" 98.044,147.955 r90 bottom (schematic designator C36)
C33 "100nF" 0603 102.108,149.736 r270 bottom (schematic designator C37)
C34 "100nF" 0603 104.013,148.336 r90 bottom (schematic designator C38)
C35 "10pF" 0603 94.107,142.494 r90 bottom (schematic designator C39)
C36 "" "CAPMP7343X19N (Murata D4)" 29.627,58.42 r0 bottom (schematic designator C13)
C37 "" "CAPMP7343X19N (Murata D4)" 142.403,57.531 r180 bottom (schematic designator C14)
C38 "" "CAPMP7343X19N (Murata D4)" 118.527,143.002 r180 bottom (schematic designator C15)
C39 "" "CAPMP7343X19N (Murata D4)" 52.206,142.748 r180 bottom (schematic designator C16)
C40 "100nF" 0603 126.238,42.799 r180 top (schematic designator C17)
C41 "100nF" 0603 134.493,42.672 r180 top (schematic designator C18)
C42 "100nF" 0603 28.956,54.229 r0 bottom (schematic designator C19)
C43 "100nF" 0603 143.129,53.975 r180 bottom (schematic designator C20)
C44 "100nF" 0603 119.761,139.827 r180 bottom (schematic designator C21)
C45 "100nF" 0603 51.181,139.319 r180 bottom (schematic designator C22)
C46 "100nF" 0603 134.366,38.989 r180 top (schematic designator C23)
C47 "100nF" 0603 126.111,38.989 r180 top (schematic designator C24)
C48 "100nF" 0603 25.527,66.04 r180 top (schematic designator C25)
C49 "100nF" 0603 146.685,68.199 r270 top (schematic designator C26)
C50 "100nF" 0603 132.08,115.57 r180 bottom (schematic designator C27)
C51 "100nF" 0603 46.482,121.793 r90 bottom (schematic designator C28)
C52 "10p" 0603 34.925,98.552 r0 bottom (schematic designator C40)
C53 "4u7 35V" 1812 35.052,107.95 r0 bottom (schematic designator C41)
C54 "4u7 35V" 1812 35.052,103.759 r0 bottom (schematic designator C42)
C55 "4u7 35V" 1812 55.626,108.458 r90 bottom (schematic designator C43)
C56 "100nF" 0603 52.451,109.982 r90 bottom (schematic designator C44)
C57 "1n" 0603 52.451,105.918 r90 bottom (schematic designator C45)
C58 "10p" 0603 122.101,137.175 r180 bottom (schematic designator C46)
C59 "4u7 35V" 1812 121.974,127.777 r180 bottom (schematic designator C47)
C60 "4u7 35V" 1812 121.974,131.968 r180 bottom (schematic designator C48)
C61 "4u7 35V" 1812 104.321,132.095 r270 bottom (schematic designator C49)
C62 "100nF" 0603 111.633,127 r270 bottom (schematic designator C50)
C63 "100nF" 0603 51.181,158.242 r180 bottom (schematic designator C51)
C64 "100nF" 0603 117.856,158.242 r180 bottom (schematic designator C52)
C65 "100nF" 0603 55.118,158.242 r180 bottom (schematic designator C53)
C66 "100nF" 0603 121.793,158.242 r180 bottom (schematic designator C54)
D1 "12V Transient Suppressor" SMA 71.247,127 r180 bottom (schematic designator D3)
D2 "BAV99" SOT23-3 99.06,136.093 r270 bottom (schematic designator D18)
D3 "Brake LED" LED0.1 59.182,131.699 r90 top (schematic designator D5)
D4 "BAV99" SOT23-3 54.61,134.239 r0 bottom
D5 "LED" 0805LED 39.497,21.59 r0 top (schematic designator D8)
D6 "LED" 0805LED 45.339,21.59 r0 top (schematic designator D9)
D7 "LED" 0805LED 124.968,21.59 r0 top (schematic designator D10)
D8 "LED" 0805LED 130.81,21.59 r0 top (schematic designator D11)
D9 "MBRS130" SMB 66.112,27.051 r0 top (schematic designator D1)
D10 "LED" 0805LED 58.619,36.195 r270 top (schematic designator D2)
D11 "MBRS130" SMB 109.982,26.797 r0 top (schematic designator D1)
D12 "LED" 0805LED 102.489,35.941 r270 top (schematic designator D2)
D13 "LTP-3786E" LTP-3786E 60.579,139.954 r90 top (schematic designator D12)
D14 "LTP-3786E" LTP-3786E 89.027,139.954 r90 top (schematic designator D13)
D15 "SP1001-04" SC70-5 25.146,132.207 r180 bottom (schematic designator D7)
D16 "SP1001-04" SC70-5 38.735,144.907 r180 bottom (schematic designator D7)
D17 "SP1001-04" SC70-5 38.712,132.2 r180 bottom (schematic designator D7)
D18 "SP1001-04" SC70-5 131.318,149.733 r0 bottom (schematic designator D7)
D19 "SP1001-04" SC70-5 131.303,136.974 r0 bottom (schematic designator D7)
D20 "SP1001-04" SC70-5 144.93,137.04 r0 bottom (schematic designator D7)
D21 "SP1001-04" SC70-5 161.559,70.68 r0 bottom (schematic designator D7)
D22 "SP1001-04" SC70-5 156.868,57.538 r0 bottom (schematic designator D7)
D23 "SP1001-04" SC70-5 149.756,45.219 r0 bottom (schematic designator D7)
D24 "SP1001-04" SC70-5 20.066,39.751 r180 bottom (schematic designator D7)
D25 "SP1001-04" SC70-5 13.002,52.658 r180 bottom (schematic designator D7)
D26 "SP1001-04" SC70-5 8.232,65.779 r180 bottom (schematic designator D7)
D27 "MBRS130" SMB 47.117,113.03 r180 bottom (schematic designator D14)
D28 "MBRS130" SMB 106.68,124.079 r0 bottom (schematic designator D15)
D29 "BAV99" SOT23-3 49.53,156.337 r0 bottom (schematic designator D6)
D30 "BAV99" SOT23-3 116.205,156.337 r0 bottom (schematic designator D16)
D31 "BAV99" SOT23-3 53.467,156.337 r0 bottom (schematic designator D17)
D32 "BAV99" SOT23-3 120.142,156.337 r0 bottom (schematic designator D19)
F1 "125mA/3A" LITTELFUSE-154 68.961,133.35 r180 bottom (schematic designator F2)
F2 "500mA" 1812 63.699,26.797 r0 bottom (schematic designator F1)
F3 "500mA" 1812 107.569,26.543 r0 bottom (schematic designator F1)
J1 "CON10" LEMO_2B_310 85.344,133.223 r180 bottom (schematic designator J3)
J2 "LPC SWD Connector" IDC8 50.927,25.819 r90 bottom (schematic designator J1)
J3 "LPC SWD Connector" IDC8 120.65,34.506 r270 bottom (schematic designator J1)
J4 "USB_MINIB" USBMINIB 69.287,12.954 r90 bottom (schematic designator J2)
J5 "USB_MINIB" USBMINIB 113.157,12.7 r90 bottom (schematic designator J2)
J6 "CON4" MICROFIT-4-VERT 53.927,147.828 r180 bottom (schematic designator J4)
J7 "CON4" MICROFIT-4-VERT 120.729,147.828 r180 bottom (schematic designator J5)
L1 "FERRITE" 0805 66.112,30.48 r180 bottom
L2 "FERRITE" 0805 109.982,30.226 r180 bottom (schematic designator L1)
L3 "INDUCTOR" WE-TPC-744042331 39.243,113.157 r180 bottom (schematic designator L2)
L4 "INDUCTOR" WE-TPC-744065221 118.037,120.03 r0 bottom (schematic designator L3)
P1 "3v3" HDR1X2 59.381,29.972 r180 bottom
P2 "5v" HDR1X2 59.381,27.432 r180 bottom
P3 "3v3" HDR1X2 103.251,29.718 r180 bottom (schematic designator P1)
P4 "5v" HDR1X2 103.251,27.178 r180 bottom (schematic designator P2)
Q1 "2N7002" SOT23-3 50.8,134.239 r0 bottom
R1 "10K" 0603 105.083,136.144 r180 bottom (schematic designator R8)
R2 "P8_H" 0603 72.771,134.874 r0 top (schematic designator R13)
R3 "P8_L" 0603 77.851,134.874 r180 top (schematic designator R14)
R4 "P5_L" 0603 77.851,131.064 r180 top (schematic designator R15)
R5 "P5_H" 0603 74.168,131.064 r180 top (schematic designator R16)
R6 "6R8" 0603 62.992,128.143 r0 bottom (schematic designator R17)
R7 "6R8" 0603 62.992,125.603 r0 bottom (schematic designator R18)
R8 "P8_H" 0603 97.917,131.064 r180 top (schematic designator R19)
R9 "SHNT" 0805 66.548,125.73 r90 bottom (schematic designator R20)
R10 "P8_L" 0603 92.837,131.064 r0 top (schematic designator R21)
R11 "P5_L" 0603 92.837,134.874 r0 top (schematic designator R22)
R12 "P5_H" 0603 96.52,134.874 r0 top (schematic designator R23)
R13 "10k" 0603 51.054,130.302 r0 bottom (schematic designator R24)
R14 "100R" 0603 95.123,135.839 r270 bottom (schematic designator R25)
R15 "10k" 0603 61.722,138.049 r180 bottom (schematic designator R26)
R16 "10k" 0603 56.007,130.302 r180 bottom (schematic designator R27)
R17 "160R" 0603 92.964,135.89 r270 bottom (schematic designator R28)
R18 "1k" 0603 40.259,35.433 r270 top (schematic designator R1)
R19 "10k" 0603 36.449,25.4 r90 top (schematic designator R2)
R20 "DNP" 0603 42.291,34.036 r90 top (schematic designator R3)
R21 "10k" 0603 32.512,25.019 r0 top (schematic designator R4)
R22 "10k" 0603 38.608,28.826 r90 top (schematic designator R5)
R23 "4.7k" 0603 37.211,35.433 r270 top (schematic designator R6)
R24 "4.7k" 0603 35.052,35.433 r270 top (schematic designator R7)
R25 "1k" 0603 131.318,24.892 r90 top (schematic designator R1)
R26 "10k" 0603 135.128,34.925 r270 top (schematic designator R2)
R27 "DNP" 0603 129.286,26.289 r270 top (schematic designator R3)
R28 "10k" 0603 139.065,35.306 r180 top (schematic designator R4)
R29 "10k" 0603 132.969,31.499 r270 top (schematic designator R5)
R30 "4.7k" 0603 134.366,24.892 r90 top (schematic designator R6)
R31 "4.7k" 0603 136.525,24.892 r90 top (schematic designator R7)
R32 "100K" 0603 50.673,21.59 r0 top (schematic designator R34)
R33 "20K" 0603 52.07,18.288 r180 top (schematic designator R35)
R34 "1K" 0603 39.751,18.288 r0 top (schematic designator R36)
R35 "1K" 0603 45.593,18.288 r0 top (schematic designator R37)
R36 "10K" 0603 45.72,11.176 r90 top (schematic designator R38)
R37 "22R" 0603 43.688,11.176 r90 top (schematic designator R39)
R38 "22R" 0603 35.687,19.431 r90 top (schematic designator R40)
R39 "22R" 0603 32.385,19.431 r90 top (schematic designator R41)
R40 "1K" 0603 125.095,18.288 r0 top (schematic designator R42)
R41 "1K" 0603 132.588,18.288 r180 top (schematic designator R43)
R42 "22R" 0603 118.491,12.446 r90 top (schematic designator R44)
R43 "1K" 0603 117.983,22.86 r90 top (schematic designator R45)
R44 "330R" 0603 58.619,38.862 r90 top (schematic designator R9)
R45 "330R" 0603 102.489,38.608 r90 top (schematic designator R9)
R46 "120R" 0603 94.107,151.384 r90 bottom
R47 "22R" 0603 133.477,48.133 r270 bottom (schematic designator R10)
R48 "22R" 0603 126.365,48.133 r270 bottom (schematic designator R11)
R49 "22R" 0603 124.333,48.133 r270 bottom (schematic designator R12)
R50 "" 0603 27.813,136.779 r180 bottom (schematic designator R29)
R51 "" 0603 22.606,136.779 r0 bottom (schematic designator R30)
R52 "" 0603 21.082,132.08 r0 bottom (schematic designator R31)
R53 "" 0603 32.281,133.738 r180 top (schematic designator R32)
R54 "" 0603 32.281,135.77 r180 top (schematic designator R33)
R55 "" 0603 41.402,149.479 r180 bottom (schematic designator R29)
R56 "" 0603 36.195,149.479 r0 bottom (schematic designator R30)
R57 "" 0603 34.671,144.78 r0 bottom (schematic designator R31)
R58 "" 0603 45.87,146.438 r180 top (schematic designator R32)
R59 "" 0603 45.87,148.47 r180 top (schematic designator R33)
R60 "" 0603 41.379,136.772 r180 bottom (schematic designator R29)
R61 "" 0603 36.172,136.772 r0 bottom (schematic designator R30)
R62 "" 0603 34.648,132.073 r0 bottom (schematic designator R31)
R63 "" 0603 45.847,133.731 r180 top (schematic designator R32)
R64 "" 0603 45.847,135.763 r180 top (schematic designator R33)
R65 "" 0603 128.651,145.161 r0 bottom (schematic designator R29)
R66 "" 0603 133.858,145.161 r180 bottom (schematic designator R30)
R67 "" 0603 135.382,149.86 r180 bottom (schematic designator R31)
R68 "" 0603 124.183,148.202 r0 top (schematic designator R32)
R69 "" 0603 124.183,146.17 r0 top (schematic designator R33)
R70 "" 0603 128.636,132.402 r0 bottom (schematic designator R29)
R71 "" 0603 133.843,132.402 r180 bottom (schematic designator R30)
R72 "" 0603 135.367,137.101 r180 bottom (schematic designator R31)
R73 "" 0603 124.168,135.443 r0 top (schematic designator R32)
R74 "" 0603 124.168,133.411 r0 top (schematic designator R33)
R75 "" 0603 142.263,132.468 r0 bottom (schematic designator R29)
R76 "" 0603 147.47,132.468 r180 bottom (schematic designator R30)
R77 "" 0603 148.994,137.167 r180 bottom (schematic designator R31)
R78 "" 0603 137.795,135.509 r0 top (schematic designator R32)
R79 "" 0603 137.795,133.477 r0 top (schematic designator R33)
R80 "" 0603 158.892,66.108 r0 bottom (schematic designator R29)
R81 "" 0603 164.099,66.108 r180 bottom (schematic designator R30)
R82 "" 0603 165.623,70.807 r180 bottom (schematic designator R31)
R83 "" 0603 154.424,69.149 r0 top (schematic designator R32)
R84 "" 0603 154.424,67.117 r0 top (schematic designator R33)
R85 "" 0603 154.201,52.966 r0 bottom (schematic designator R29)
R86 "" 0603 159.408,52.966 r180 bottom (schematic designator R30)
R87 "" 0603 160.932,57.665 r180 bottom (schematic designator R31)
R88 "" 0603 149.733,56.007 r0 top (schematic designator R32)
R89 "" 0603 149.733,53.975 r0 top (schematic designator R33)
R90 "" 0603 147.089,40.647 r0 bottom (schematic designator R29)
R91 "" 0603 152.296,40.647 r180 bottom (schematic designator R30)
R92 "" 0603 153.82,45.346 r180 bottom (schematic designator R31)
R93 "" 0603 142.621,43.688 r0 top (schematic designator R32)
R94 "" 0603 142.621,41.656 r0 top (schematic designator R33)
R95 "" 0603 22.733,44.323 r180 bottom (schematic designator R29)
R96 "" 0603 17.526,44.323 r0 bottom (schematic designator R30)
R97 "" 0603 16.002,39.624 r0 bottom (schematic designator R31)
R98 "" 0603 27.201,41.282 r180 top (schematic designator R32)
R99 "" 0603 27.201,43.314 r180 top (schematic designator R33)
R100 "" 0603 15.669,57.23 r180 bottom (schematic designator R29)
R101 "" 0603 10.462,57.23 r0 bottom (schematic designator R30)
R102 "" 0603 8.938,52.531 r0 bottom (schematic designator R31)
R103 "" 0603 20.137,54.188 r180 top (schematic designator R32)
R104 "" 0603 20.137,56.22 r180 top (schematic designator R33)
R105 "" 0603 10.899,70.351 r180 bottom (schematic designator R29)
R106 "" 0603 5.692,70.351 r0 bottom (schematic designator R30)
R107 "" 0603 4.168,65.652 r0 bottom (schematic designator R31)
R108 "" 0603 15.367,67.31 r180 top (schematic designator R32)
R109 "" 0603 15.367,69.342 r180 top (schematic designator R33)
R110 "Res Semi" 0603 34.925,100.457 r0 bottom (schematic designator R47)
R111 "100k" 0603 50.927,103.505 r0 bottom (schematic designator R48)
R112 "Res Semi" 0603 39.878,100.457 r180 bottom (schematic designator R49)
R113 "?" 0603 50.8,105.918 r90 bottom (schematic designator R50)
R114 "Res Semi" 0603 122.101,135.27 r180 bottom (schematic designator R51)
R115 "100k" 0603 105.083,134.254 r180 bottom (schematic designator R52)
R116 "Res Semi" 0603 117.148,135.27 r0 bottom (schematic designator R53)
SW1 "K5V" K5V_PM 29.464,129.794 r90 top
SW2 "K5V" K5V_PM 43.053,142.494 r90 top (schematic designator SW1)
SW3 "K5V" K5V_PM 43.03,129.787 r90 top (schematic designator SW1)
SW4 "K5V" K5V_PM 127,152.146 r270 top (schematic designator SW1)
SW5 "K5V" K5V_PM 126.985,139.387 r270 top (schematic designator SW1)
SW6 "K5V" K5V_PM 140.612,139.453 r270 top (schematic designator SW1)
SW7 "K5V" K5V_PM 157.241,73.093 r270 top (schematic designator SW1)
SW8 "K5V" K5V_PM 152.55,59.951 r270 top (schematic designator SW1)
SW9 "K5V" K5V_PM 145.438,47.632 r270 top (schematic designator SW1)
SW10 "K5V" K5V_PM 24.384,37.338 r90 top (schematic designator SW1)
SW11 "K5V" K5V_PM 17.32,50.245 r90 top (schematic designator SW1)
SW12 "K5V" K5V_PM 12.55,63.366 r90 top (schematic designator SW1)
U1 "INA214" SC70-6 55.499,126.746 r90 bottom (schematic designator U15)
U2 "SN65HVD235. pull Rs Hi for standby" SO8 67.818,132.969 r270 top (schematic designator U16)
U3 "SN65HVD235. pull Rs Hi for standby" SO8 103.505,132.993 r90 top (schematic designator U17)
U4 "LPC11C14" QFP48 38.608,26.843 r0 bottom (schematic designator U1)
U5 "24AAXX" SOT23-5 41.148,36.068 r90 bottom (schematic designator U2)
U6 "XC61CN2002MR" SOT23-3 48.387,35.687 r180 top (schematic designator U3)
U7 "LPC11C14" QFP48 132.969,33.482 r180 bottom (schematic designator U1)
U8 "24AAXX" SOT23-5 130.429,24.257 r270 bottom (schematic designator U2)
U9 "XC61CN2002MR" SOT23-3 123.19,24.638 r0 top (schematic designator U3)
U10 "FT232R" SSOP28w 63.445,37.465 r180 bottom (schematic designator U4)
U11 "FT232R" SSOP28w 107.315,37.211 r180 bottom (schematic designator U4)
U12 "MAX6955_SSOP" SOP127P600-8N-36 84.709,147.574 r270 bottom (schematic designator U18)
U13 "MC14043B" SOIC127P600X175-16N 38.862,122.428 r270 bottom (schematic designator U5)
U14 "SN74LVC2T45" TSOP65P400X130-8N 133.731,42.672 r90 bottom (schematic designator U6)
U15 "SN74LV595AD" SOIC127P600X175-16N 50.927,141.732 r270 top (schematic designator U7)
U16 "SN74LVC2T45" TSOP65P400X130-8N 125.476,42.672 r90 bottom (schematic designator U8)
U17 "MC14043B" SOIC127P600X175-16N 131.318,121.793 r0 bottom (schematic designator U9)
U18 "SN74LV595AD" SOIC127P600X175-16N 117.729,142.748 r270 top (schematic designator U10)
U19 "MC14043B" SOIC127P600X175-16N 146.685,67.945 r180 bottom (schematic designator U11)
U20 "SN74LV595AD" SOIC127P600X175-16N 141.732,57.531 r270 top (schematic designator U12)
U21 "ADG704" MSOP-UN10_L 11.811,158.623 r0 top
U21 "SN74LV595AD" SOIC127P600X175-16N 29.718,58.293 r180 top (schematic designator U13)
U22 "MC14043B" SOIC127P600X175-16N 23.622,66.04 r90 bottom (schematic designator U14)
U23 "LTC1474" SO8 45.974,106.172 r90 bottom (schematic designator U19)
U24 "LTC1474" SO8 111.052,131.079 r270 bottom (schematic designator U20)
Y1 "12 MHz" HC49/4H 34.417,24.002 r90 bottom
Y2 "12 MHz" HC49/4H 137.16,36.323 r270 bottom (schematic designator Y1)

## Footprints (in the part's own frame and the unit in brackets; to place one, negate y for a bottom-side part, rotate by r counter-clockwise, add the part's x,y. Pads: shape width x height; smd on the part's side, far side on the other; paste and mask are expansions set on the pad)
0603 [mil]
  rect 35.43x30 smd: 1(0,0) 2(55,0)
  silkscreen extent -24,-24 79,24
0805 [mm]
  rect 1.7x1.27 smd: 1(0,0) 2(2.286,0)
  silkscreen extent -1,-0.9 3.3,0.9
0805LED [mm]
  rect 1.3x1.4 smd: A(0,0) K(1.9,0)
  silkscreen extent -1.25,-1.3 3.15,1.3
1812 [mm]
  rect 2.4x3.2 smd: 1(0,0) 2(4.5,0)
  silkscreen extent -1.27,-1.66 5.77,1.7
"CAPMP7343X19N (Murata D4)" [mm] "Molded Capacitor, 2-Leads, Body 7.3x4.3mm, IPC Medium Density"
  rect 2.45x2.5 smd: 1(-3.075,0) 2(3.075,0)
  silkscreen extent -4.82,-2.25 3.8,2.25, body extent -3.8,-2.25 3.8,2.25, height 1.9
HC49/4H [mm]
  round 1.7 hole 0.5: 1(3.085,0) 2(7.965,0)
  silkscreen extent 0,-2.35 11.05,2.35
HDR1X2 [mm] "Connector; Header; 2 Position"
  rect 1.5x1.5 hole 0.9: 1(0,0)
  round 1.5 hole 0.9: 2(2.54,0)
  silkscreen extent -1.27,-1.27 3.81,1.27
IDC8 [mm]
  rect 1.6x1.6 hole 0.9: 1(0,0)
  round 1.6 hole 0.9: 2(0,2.54) 3(2.54,0) 4(2.54,2.54) 5(5.08,0) 6(5.08,2.54) 7(7.62,0) 8(7.62,2.54)
  silkscreen extent -1.27,-1.27 8.89,3.81
K5V_PM [mm] "K5V Illuminated Tactile Switch - Panel Mount"
  oval 2x2.6 hole 1 slot 2.26 at 90 deg: 1(9.699,1.699) 2(-0.001,1.699) 3(9.699,6.799) 4(-0.001,6.799)
  oval 2x2.1 hole 1 slot 1.7 at 90 deg: 5(9.699,4.249) 6(-0.001,4.249)
  silkscreen extent 0,0 9.7,8.5, body extent 0,0 9.7,8.5, height 13.35
LED0.1 [mil]
  round 55 hole 28: A(0,0) K(100,0)
  silkscreen extent -10,-60 100,60
LEMO_2B_310 [mm]
  round 1.4 hole 1: 1(1.205,2.91) 2(2.91,1.205) 3(2.91,-1.205) 4(1.205,-2.91) 5(-1.205,-2.91) 6(-2.91,-1.205) 7(-2.91,1.205) 8(-1.205,2.91) 9(0,1.075) 10(0,-1.075)
  silkscreen extent -10,-10 10,12.06, body extent -10,-9.92 10,9.92, height 21.5
LITTELFUSE-154 [mm]
  rect 5x3.81 smd: 1(-3.185,0) 2(3.185,0)
  silkscreen extent -5.6,-2.51 5.6,2.5
LTP-3786E [mm]
  rect 2.5x1.3 hole 0.9: 1(0,0)
  oval 2.5x1.3 hole 0.9: 2(0,-2.54) 3(0,-5.08) 4(0,-7.62) 5(0,-10.16) 6(0,-12.7) 7(0,-15.24) 8(0,-17.78) 9(0,-20.32) 10(15.24,-20.32) 11(15.24,-17.78) 12(15.24,-15.24) 13(15.24,-12.7) 14(15.24,-10.16) 15(15.24,-7.62) 16(15.24,-5.08) 17(15.24,-2.54) 18(15.24,0)
  silkscreen extent 2.08,-21.59 13.16,1.27, body extent -1.91,-22.86 17.14,2.54, height 8.03
MICROFIT-4-VERT [mm]
  round 2 hole 1: 0(-3,3.94) 0(6,3.94) 1(0,0) 2(0,3) 3(3,0) 4(3,3)
  silkscreen extent -3.4,-2.2 6.6,6.6, body extent -3.57,-2.47 6.57,6.3, height 9.95
MSOP-UN10_L [mm]
  oval 1.45x0.25 smd: 1(-2.025,1) 2(-2.025,0.5) 3(-2.025,0) 4(-2.025,-0.5) 5(-2.025,-1) 6(2.025,-1) 7(2.025,-0.5) 8(2.025,0) 9(2.025,0.5) 10(2.025,1)
  silkscreen extent -2.15,-1.6 0.9,1.8, body extent -1.6,-1.6 1.6,1.6, height 1.1
QFP48 [mm]
  rect 1x0.26 smd: 1(0.013,0.01)
  oval 1x0.26 smd: 2(0.013,-0.49) 3(0.013,-0.99) 4(0.013,-1.49) 5(0.013,-1.99) 6(0.013,-2.49) 7(0.013,-2.99) 8(0.013,-3.49) 9(0.013,-3.99) 10(0.013,-4.49) 11(0.013,-4.99) 12(0.013,-5.49) 25(9.113,-5.49) 26(9.113,-4.99) 27(9.113,-4.49) 28(9.113,-3.99) 29(9.113,-3.49) 30(9.113,-2.99) 31(9.113,-2.49) 32(9.113,-1.99) 33(9.113,-1.49) 34(9.113,-0.99) 35(9.113,-0.49) 36(9.113,0.01)
  oval 0.26x1 smd: 13(1.813,-7.29) 14(2.313,-7.29) 15(2.813,-7.29) 16(3.313,-7.29) 17(3.813,-7.29) 18(4.313,-7.29) 19(4.813,-7.29) 20(5.313,-7.29) 21(5.813,-7.29) 22(6.313,-7.29) 23(6.813,-7.29) 24(7.313,-7.29) 37(7.313,1.81) 38(6.813,1.81) 39(6.313,1.81) 40(5.813,1.81) 41(5.313,1.81) 42(4.813,1.81) 43(4.313,1.81) 44(3.813,1.81) 45(3.313,1.81) 46(2.813,1.81) 47(2.313,1.81) 48(1.813,1.81)
  silkscreen extent 1.1,-6.2 8.03,0.73
SC70-5 [mm] "Equiv. to SC88-A, SOT-353"
  rect 0.4x0.9 smd: 1(-0.65,0) 2(0,0) 3(0.65,0) 4(0.65,2.1) 5(-0.65,2.1)
  silkscreen extent -1.1,0.4 1.1,1.7
SC70-6 [mm]
  rect 0.4x0.9 smd: 1(-0.65,0) 2(0,0) 3(0.65,0) 4(0.65,2.1) 5(0,2.1) 6(-0.65,2.1)
  silkscreen extent -1.1,0.4 1.1,1.7
SMA [mm]
  rect 1.8x2 smd: A(-2,0) K(2,0)
  silkscreen extent -2,-1.48 2,1.48
SMB [mm]
  rect 2.4x2.5 smd: A(-2.385,0) K(2.385,0)
  silkscreen extent -2.28,-1.9 2.3,1.9
SO8 [mm]
  rect 0.6x2.2 smd: 1(-1.905,-2.6)
  oval 0.6x2.2 smd: 2(-0.635,-2.6) 3(0.635,-2.6) 4(1.905,-2.6) 5(1.905,2.6) 6(0.635,2.6) 7(-0.635,2.6) 8(-1.905,2.6)
  silkscreen extent -2.88,-2.72 2.5,1.1
SOIC127P600X175-16N [mm] "SOIC, 16-Leads, Body 10.0x4.0mm (max), Pitch 1.27mm, IPC Medium Density"
  oval 2.2x0.6 smd: 1(-2.4,4.445) 2(-2.4,3.175) 3(-2.4,1.905) 4(-2.4,0.635) 5(-2.4,-0.635) 6(-2.4,-1.905) 7(-2.4,-3.175) 8(-2.4,-4.445) 9(2.4,-4.445) 10(2.4,-3.175) 11(2.4,-1.905) 12(2.4,-0.635) 13(2.4,0.635) 14(2.4,1.905) 15(2.4,3.175) 16(2.4,4.445)
  silkscreen extent -2.52,-5 0.9,5.42, body extent -2,-5 2,5, height 1.75
SOP127P600-8N-36 [mm] "Maxim 36L SSOP, 0.80mm pitch (for MAX6955)"
  oval 2x0.55 smd: 1(-4.675,6.8) 2(-4.675,6) 3(-4.675,5.2) 4(-4.675,4.4) 5(-4.675,3.6) 6(-4.675,2.8) 7(-4.675,2) 8(-4.675,1.2) 9(-4.675,0.4) 10(-4.675,-0.4) 11(-4.675,-1.2) 12(-4.675,-2) 13(-4.675,-2.8) 14(-4.675,-3.6) 15(-4.675,-4.4) 16(-4.675,-5.2) 17(-4.675,-6) 18(-4.675,-6.8) 19(4.675,-6.8) 20(4.675,-6) 21(4.675,-5.2) 22(4.675,-4.4) 23(4.675,-3.6) 24(4.675,-2.8) 25(4.675,-2) 26(4.675,-1.2) 27(4.675,-0.4) 28(4.675,0.4) 29(4.675,1.2) 30(4.675,2) 31(4.675,2.8) 32(4.675,3.6) 33(4.675,4.4) 34(4.675,5.2) 35(4.675,6) 36(4.675,6.8)
  silkscreen extent -4.8,-7.8 3.27,7.8, body extent -3.8,-7.78 3.8,7.77, height 2.64
SOT23-3 [mm]
  rect 1x1.25 smd: 1(0,0) 2(1.905,0) 3(0.965,2.032)
  silkscreen extent -0.51,-0.13 2.41,2.16
SOT23-5 [mm]
  rect 0.4x0.9 smd: 1(0,0) 2(0.953,0) 3(1.91,0) 4(1.91,2.59) 5(0,2.59)
  silkscreen extent -0.4,0.4 2.3,2.1
SSOP28w [mm]
  rect 2.2x0.4 smd: 1(-3.82,4.28)
  oval 2.2x0.4 smd: 2(-3.82,3.63) 3(-3.82,2.98) 4(-3.82,2.33) 5(-3.82,1.68) 6(-3.82,1.03) 7(-3.82,0.38) 8(-3.82,-0.27) 9(-3.82,-0.92) 10(-3.82,-1.57) 11(-3.82,-2.22) 12(-3.82,-2.87) 13(-3.82,-3.52) 14(-3.82,-4.17) 15(3.98,-4.17) 16(3.98,-3.52) 17(3.98,-2.87) 18(3.98,-2.22) 19(3.98,-1.57) 20(3.98,-0.92) 21(3.98,-0.27) 22(3.98,0.38) 23(3.98,1.03) 24(3.98,1.68) 25(3.98,2.33) 26(3.98,2.98) 27(3.98,3.63) 28(3.98,4.28)
  silkscreen extent -2.09,-4.5 2.25,4.6
TSOP65P400X130-8N [mm] "TSOP, 8-Leads, Body 3.2x2.9mm (max), Pitch 0.65mm, IPC Medium Density (TI - DCT)"
  oval 1.6x0.35 smd: 1(-1.725,0.975) 2(-1.725,0.325) 3(-1.725,-0.325) 4(-1.725,-0.975) 5(1.725,-0.975) 6(1.725,-0.325) 7(1.725,0.325) 8(1.725,0.975)
  silkscreen extent -1.85,-1.6 0.77,1.83, body extent -1.45,-1.58 1.45,1.57, height 1.3
USBMINIB [mm]
  rect 2.25x0.5 smd mask+0: 1(7.55,-4.2) 2(7.55,-5) 3(7.55,-5.8) 4(7.55,-6.6) 5(7.55,-7.4)
  rect 1.2x6.4 on Bottom Overlay mask+0: 2(0.498,-5.8)
  rect 4x2.05 smd mask+0: 6(3.3,-10.725) 6(3.3,-0.875)
  rect 3.5x2.05 smd mask+0: 6(7.55,-10.725) 6(7.55,-0.875)
WE-TPC-744042331 [mm] "WE-TPC SMD Shielded Tiny Power Inductor (744042331)"
  rect 1.8x5.3 smd: 1(-1.85,0) 2(1.85,0)
  silkscreen extent -0.1,-2.5 0.1,2.5, body extent -2.5,-2.5 2.5,2.5, height 2
WE-TPC-744065221 [mm] "WE-TPC SMD Shielded Tiny Power Inductor (744065221)"
  rect 2.35x4.6 smd: 1(-4.525,0) 2(4.525,0)
  silkscreen extent -5.2,-5.15 5.2,5.15, body extent -5.15,-5.15 5.15,5.15, height 3.1